# Altium PCB PCB_BME680_circuit_ajustes_2022-11-16.pcbdoc
Units mm, origin at the board's own origin, x right, y up, seen from the top; angles counter-clockwise.
Board outline 107.67 x 80.65 mm, 2 copper layers (Top Layer, Bottom Layer); 8 components, 39 nets, 74 pads, 13 vias.
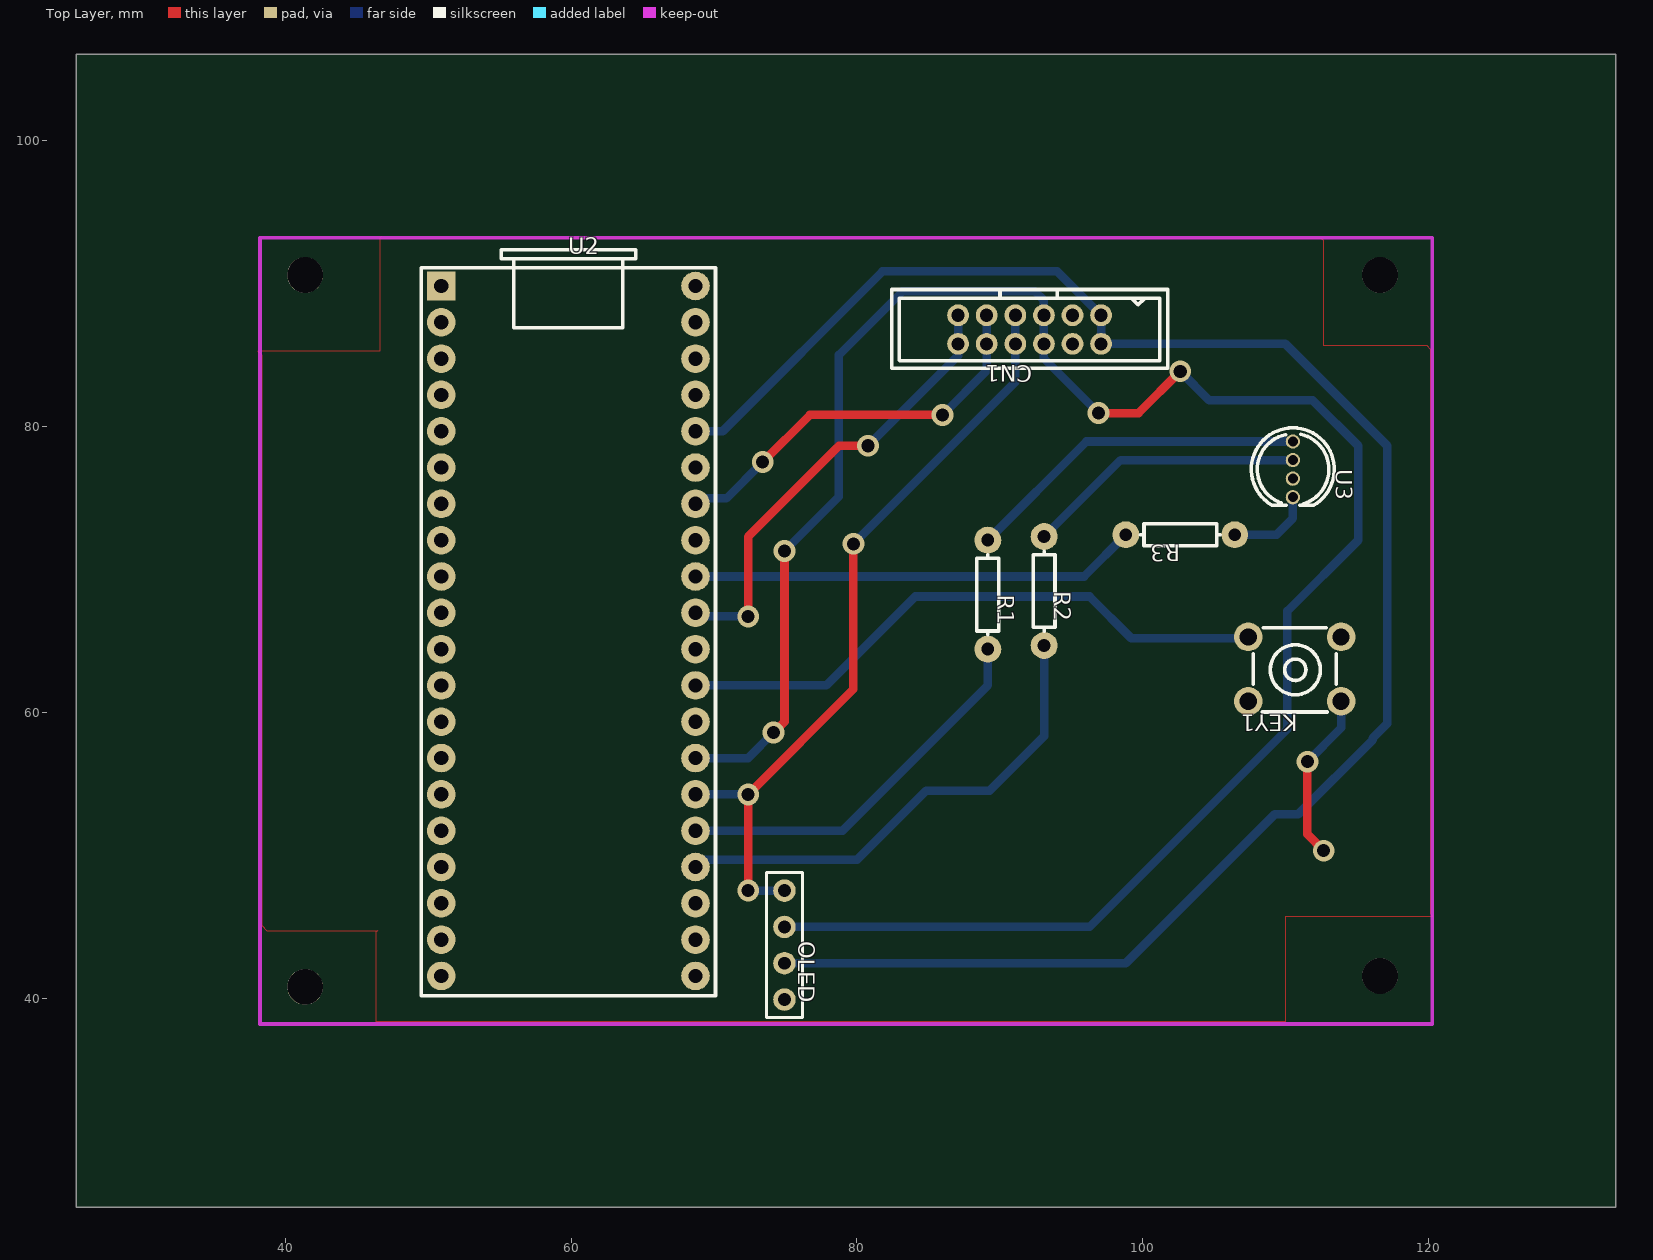
[diagram p0: Top Layer view]
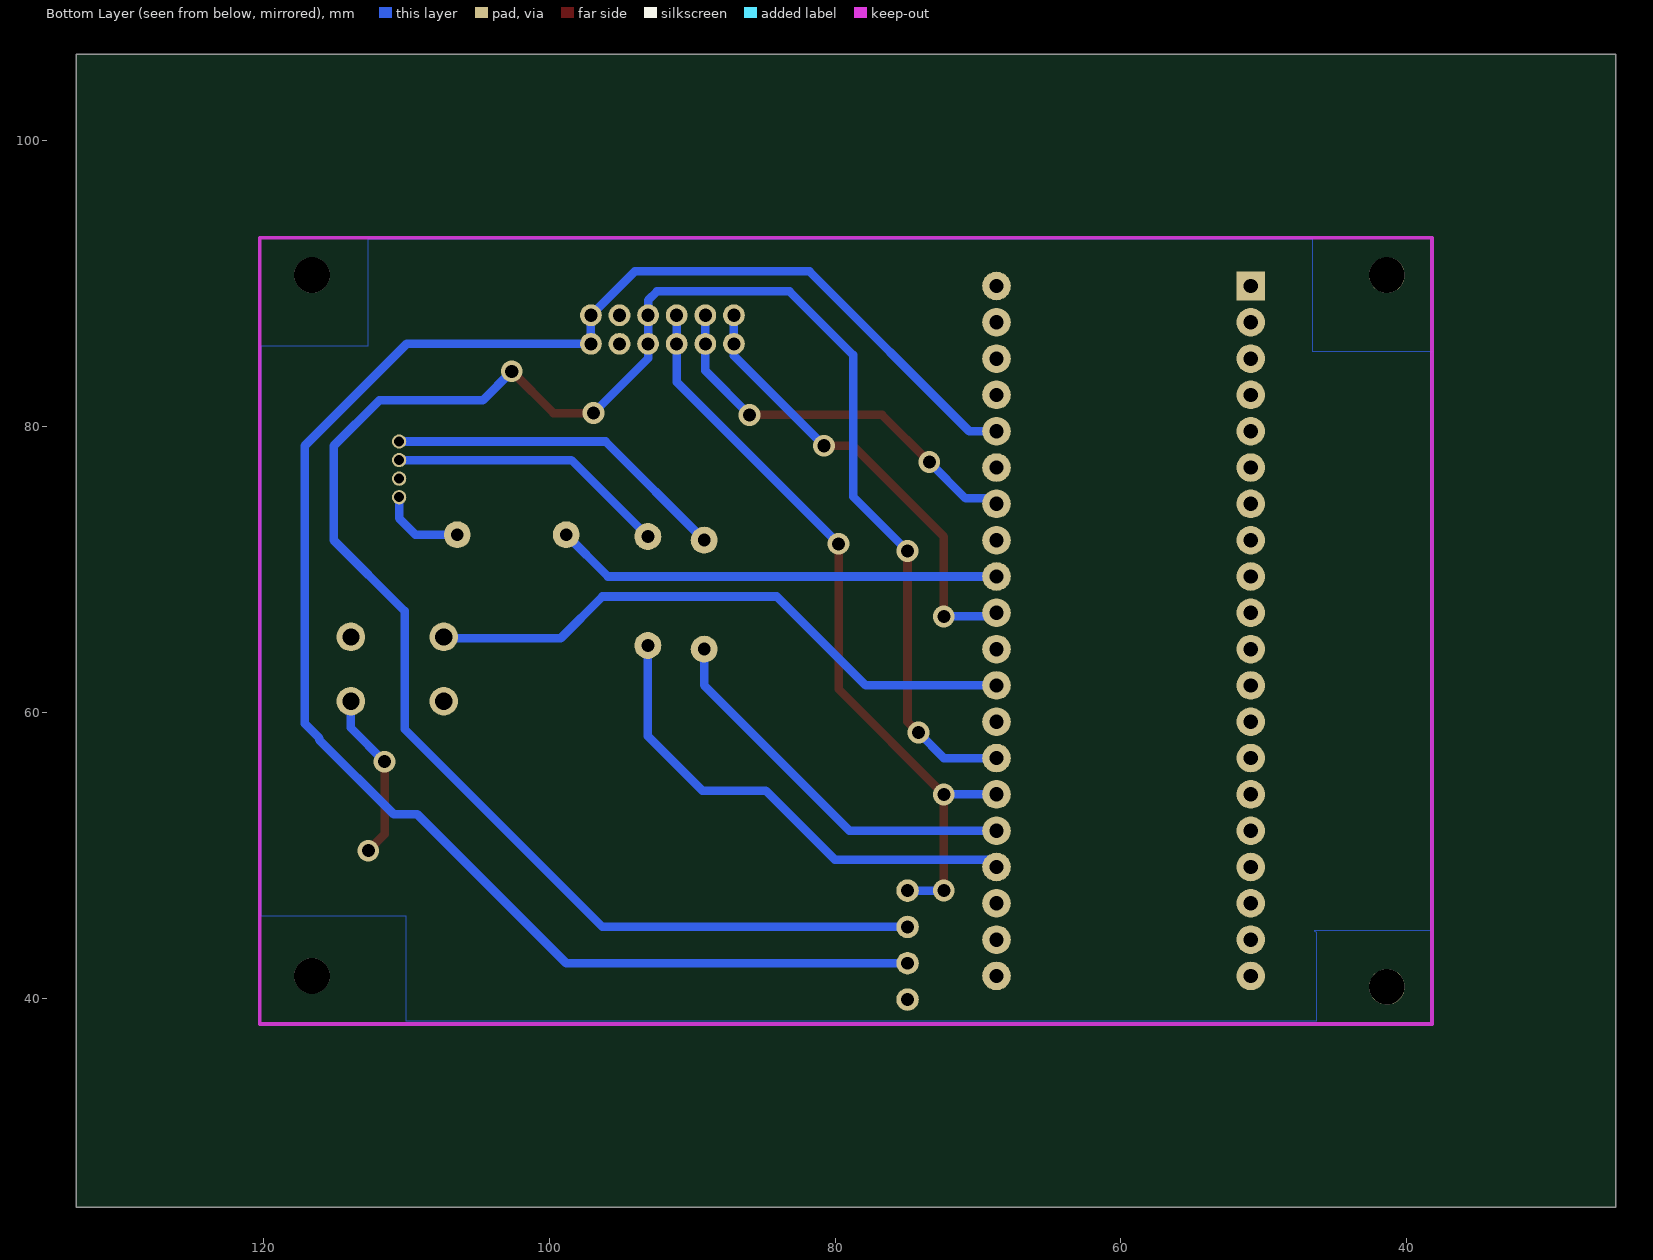
[diagram p1: Bottom Layer view, seen from below]

## Layer stack, top to bottom
Top Layer: signal copper (thickness not stored)
Dielectric: dielectric 0.32, FR-4, Dk 4.8
Bottom Layer: signal copper (thickness not stored)

## Board outline
133.069,25.4 25.4,25.4 25.4,106.054 133.069,106.054

## Components (designator, comment, footprint, x,y, rotation, side; value= is the part's Value field where it differs from the comment)
CN1 "3111-12SG0BK00T1" IDC-TH_12P-P2.00-V-R2-C6-S2.00 92.075,86.804 r180 top
KEY1 "button6*6*8.5" KEY-TH_4P-L6.0-W6.0-P4.50 110.617,63.055 r180 top
OLED "OLED SSD1306" HDR-F-2.54_1X4 74.93,43.751 r270 top
R1 "1k" R_AXIAL-0.3 89.154,68.262 r270 top
R2 "1k" R_AXIAL-0.3 93.091,68.516 r270 top
R3 "1k" R_AXIAL-0.3 102.616,72.453 r180 top
U2 "Raspberry Pico" RASPBERRYPICO 59.817,65.722 r0 top
U3 "LED-RGB 共阴 插件 直径5MM" LED-TH_4P-BD5.8-P1.30 110.49,77.025 r270 top

## Footprints (in the part's own frame and the unit in brackets; to place one, negate y for a bottom-side part, rotate by r counter-clockwise, add the part's x,y. Pads: shape width x height; smd on the part's side, far side on the other; paste and mask are expansions set on the pad)
HDR-F-2.54_1X4 [mil]
  round 62 hole 35: 1(-150,0) 2(-50,0) 3(50,0) 4(150,0)
  silkscreen extent -200,-50 200,50
IDC-TH_12P-P2.00-V-R2-C6-S2.00 [mil]
  round 60 hole 36: 1(-196.85,-39.4) 2(-196.85,39.3) 3(-118.15,-39.4) 4(-118.15,39.3) 5(-39.35,-39.4) 6(-39.35,39.3) 7(39.35,-39.4) 8(39.35,39.3) 9(118.05,-39.4) 10(118.05,39.4) 11(196.85,-39.4) 12(196.85,39.3)
  silkscreen extent -380,-110 380,107
KEY-TH_4P-L6.0-W6.0-P4.50 [mm]
  round 2 hole 1.2: 1(-3.25,-2.25) 2(3.25,-2.25) 3(3.25,2.25) 4(-3.25,2.25)
  silkscreen extent -2.9,-2.9 2.9,3
LED-TH_4P-BD5.8-P1.30 [mm]
  round 1 hole 0.7: 1(1.95,0) 2(0.65,0) 3(-0.65,0) 4(-1.95,0)
  silkscreen extent -2.91,-2.9 2.51,2.9
R_AXIAL-0.3 [mil]
  round 74 hole 35.4: 1(-150,0) 2(150,0)
  silkscreen extent -110,-30 110,30
RASPBERRYPICO [mm]
  rect 2x2 hole 1: 1(-8.89,24.13)
  round 2 hole 1: 2(-8.89,21.59) 3(-8.89,19.05) 4(-8.89,16.51) 5(-8.89,13.97) 6(-8.89,11.43) 7(-8.89,8.89) 8(-8.89,6.35) 9(-8.89,3.81) 10(-8.89,1.27) 11(-8.89,-1.27) 12(-8.89,-3.81) 13(-8.89,-6.35) 14(-8.89,-8.89) 15(-8.89,-11.43) 16(-8.89,-13.97) 17(-8.89,-16.51) 18(-8.89,-19.05) 19(-8.89,-21.59) 20(-8.89,-24.13) 21(8.89,-24.13) 22(8.89,-21.59) 23(8.89,-19.05) 24(8.89,-16.51) 25(8.89,-13.97) 26(8.89,-11.43) 27(8.89,-8.89) 28(8.89,-6.35) 29(8.89,-3.81) 30(8.89,-1.27) 31(8.89,1.27) 32(8.89,3.81) 33(8.89,6.35) 34(8.89,8.89) 35(8.89,11.43) 36(8.89,13.97) 37(8.89,16.51) 38(8.89,19.05) 39(8.89,21.59) 40(8.89,24.13)
  silkscreen extent -10.29,-25.53 10.29,26.67

## Free pads (board coordinates)
  round 2.5 hole 2.5 unplated: ""(41.402,40.83) ""(41.402,90.614) ""(116.586,41.592) ""(116.586,90.614)

## Via types
v1: diameter 1.524, hole 0.914, Top Layer to Bottom Layer, tented both sides, 13 vias

## Nets (pads, with @x,y where several pads share a name; then routed paths per layer and width w, separated by ;. In a path a pad name is that pad's centre, name@x,y a point inside that pad or via, vN(x,y) a via of type N, cw(c..) or ccw(c..) an arc to the next point about the centre after c; other vN are vias at no path point)
+3.3: CN1.1 CN1.2 OLED.3 U2.36 | length 127.9
  Bottom Layer w0.6: U2.36 70.612,79.692 81.788,90.868 94.013,90.868 CN1.1@97.076,87.805 ; OLED.3 98.806,42.481 109.22,52.895 110.871,52.895 116.078,58.102 116.078,58.229 117.094,59.245 117.094,78.676 109.964,85.806 CN1.2 CN1.1
GND: CN1.3 CN1.4 KEY1.4 OLED.4 U2.3 U2.8 U2.13 U2.18 U2.23 U2.28 U2.33 U2.38 U3.2 | length 11.9
  Top Layer w0.6: v1(111.506,56.578) 111.506,51.498 v1(112.649,50.355)
  Bottom Layer w0.6: v1(111.506,56.578) 113.867,58.939 KEY1.4
KEY1_1: KEY1.1
KEY1_3: KEY1.3
S$120: 
U2_1: U2.1
U2_2: U2.2
U2_4: U2.4
U2_5: U2.5
U2_6: U2.6
U2_7: U2.7
U2_9: U2.9
U2_10: U2.10
U2_11: U2.11
U2_12: U2.12
U2_14: U2.14
U2_15: U2.15
U2_16: U2.16
U2_17: U2.17
U2_19: U2.19
U2_20: U2.20
U2_21: U2.21
U2_22: U2.22
U2_24: R2.2 U2.24 | length 34.8
  Bottom Layer w0.6: U2.24 68.707,49.72 80.01,49.72 84.836,54.546 89.281,54.546 93.091,58.356 R2.2
U2_25: R1.2 U2.25 | length 27.2
  Bottom Layer w0.6: U2.25 78.994,51.752 89.154,61.912 R1.2
U2_26: CN1.7 CN1.8 OLED.1 U2.26 | length 54.2
  Top Layer w0.6: v1(72.39,47.561) v1(72.39,54.292) 79.756,61.658 v1(79.756,71.818)
  Bottom Layer w0.6: U2.26 v1(72.39,54.292) ; v1(72.39,47.561) OLED.1 ; v1(79.756,71.818) 91.076,83.138 CN1.8 CN1.7
U2_27: CN1.5 CN1.6 OLED.2 U2.27 | length 144.9
  Top Layer w0.6: v1(74.168,58.61) 74.93,59.372 v1(74.93,71.31) ; v1(96.901,80.962) 99.695,80.962 v1(102.616,83.883)
  Bottom Layer w0.6: U2.27@68.834,56.705 U2.27 72.39,56.832 v1(74.168,58.61) ; OLED.2 96.266,45.021 110.109,58.864 110.109,67.119 115.062,72.072 115.062,78.676 111.887,81.851 104.648,81.851 v1(102.616,83.883) ; v1(74.93,71.31) 78.74,75.12 78.74,85.026 83.185,89.471 92.456,89.471 93.074,88.853 CN1.5 CN1.6 93.074,84.789 v1(96.901,80.962)
U2_29: KEY1.2 U2.29 | length 42.5
  Bottom Layer w0.6: U2.29 77.851,61.912 84.074,68.135 91.567,68.135 96.266,68.135 99.187,65.214 107.276,65.214 KEY1.2
U2_30: U2.30
U2_31: CN1.11 CN1.12 U2.31 | length 32.3
  Top Layer w0.6: v1(72.39,66.738) 72.39,72.326 78.74,78.676 v1(80.772,78.676)
  Bottom Layer w0.6: U2.31 68.961,66.738 v1(72.39,66.738) ; v1@80.645,78.549 87.075,84.979 CN1.12 CN1.11
U2_32: R3.2 U2.32 | length 31.3
  Bottom Layer w0.6: U2.32 95.885,69.532 R3.2
U2_34: CN1.9 CN1.10 U2.34 | length 28.1
  Top Layer w0.6: v1(73.406,77.533) 76.708,80.835 v1(85.979,80.835)
  Bottom Layer w0.6: U2.34 69.088,74.993 70.866,74.993 v1(73.406,77.533) ; v1(85.979,80.835) 89.077,83.933 CN1.10 CN1.9
U2_35: U2.35
U2_37: U2.37
U2_39: U2.39
U2_40: U2.40
U3_1: R3.1 U3.1 | length 6
  Bottom Layer w0.6: R3.1 109.347,72.453 110.49,73.596 U3.1
U3_3: R2.1 U3.3 | length 19.6
  Bottom Layer w0.6: R2.1 98.44,77.675 U3.3
U3_4: R1.1 U3.4 | length 24.2
  Bottom Layer w0.6: R1.1 96.057,78.975 U3.4

## Polygon pours and split planes (outlines as drawn)
GND on Top Layer (solid): 46.736,93.281 46.609,93.154 46.609,85.28 38.1,85.28 38.354,85.026 38.354,45.148 38.735,44.767 46.482,44.767 46.355,44.64 46.355,38.417 109.982,38.417 109.982,45.783 120.269,45.783 120.142,45.91 120.142,85.407 119.888,85.661 112.649,85.661 112.649,93.027 112.522,93.154 46.609,93.154
GND on Bottom Layer (solid): 46.609,93.154 46.609,85.28 38.227,85.28 38.354,85.153 38.354,44.767 46.482,44.767 46.355,44.64 46.355,38.417 109.982,38.417 109.982,45.783 120.142,45.783 120.142,85.661 112.649,85.661 112.649,93.154 46.609,93.154